# Altium PCB RockRTK.PcbDoc (part 4 of 8)
Units mm, origin at the board's own origin, x right, y up, seen from the top; angles counter-clockwise.
Board outline 128 x 72 mm, 6 copper layers (Top Layer, MidLayer1GND, MidLayer2SIG, MidLayer3PWR, MidLayer4GND, Bottom Layer), stack 1.538 mm thick; 400 components, 307 nets, 1795 pads, 1243 vias.
Unrouted connection lines stored in the file: 522.
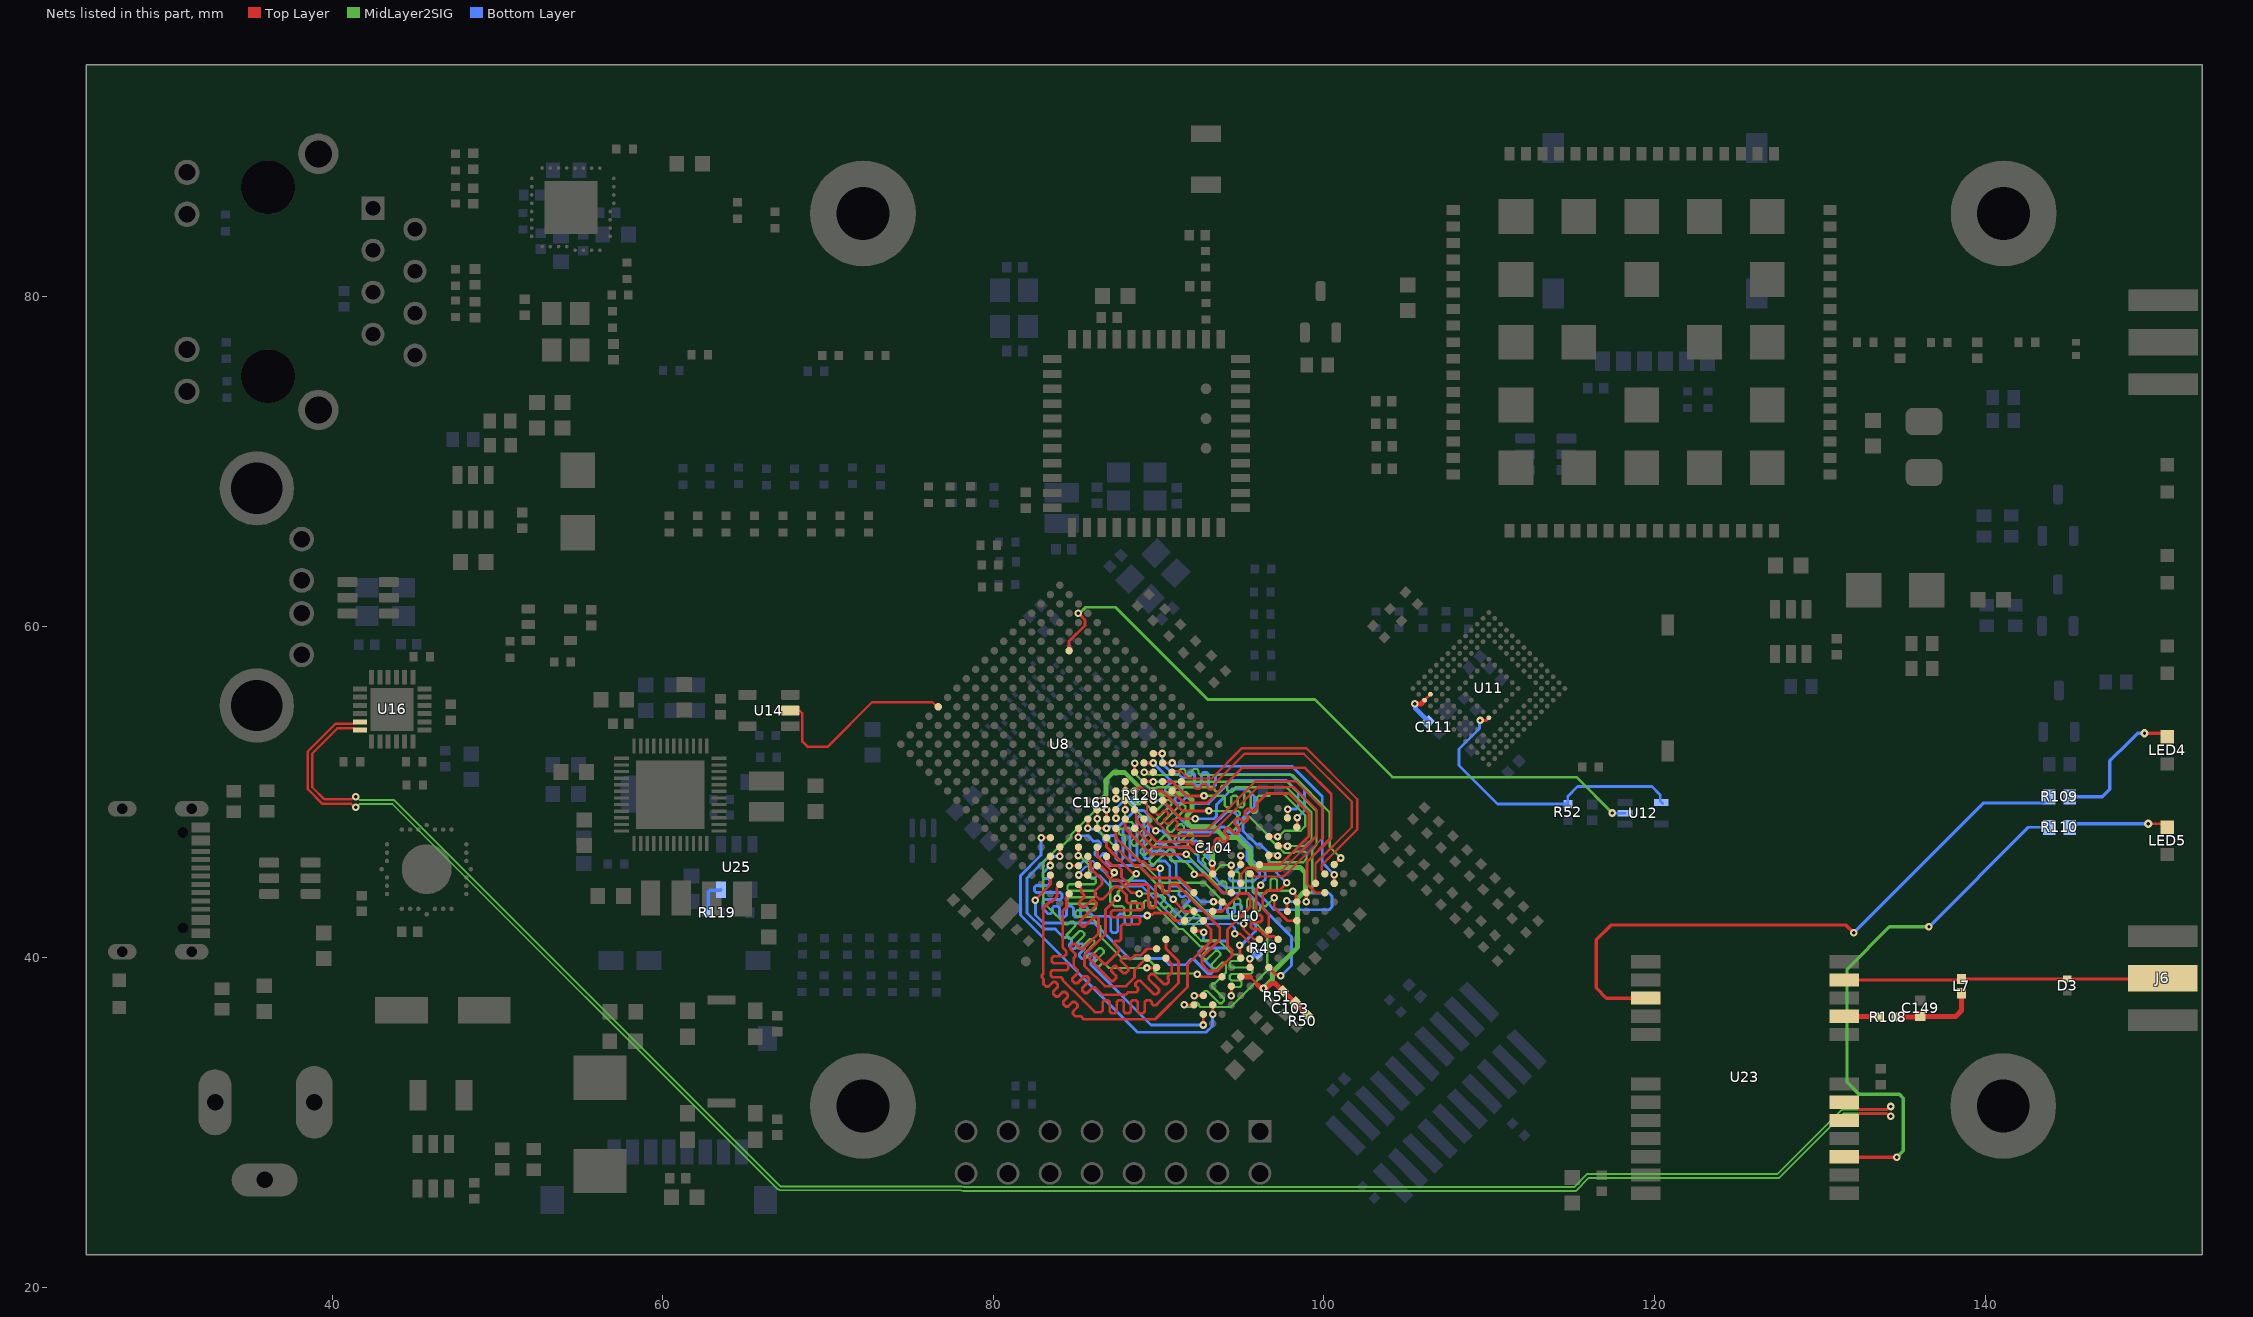
[diagram p7: the nets of this part, all layers, seen from the top]

## Via types
v1: diameter 0.5, hole 0.2, Top Layer to Bottom Layer, tented both sides, 532 vias
v2: diameter 0.457, hole 0.203, Top Layer to Bottom Layer, tented both sides, 414 vias
v3: diameter 0.5, hole 0.2, Top Layer to Bottom Layer, 233 vias
v4: diameter 0.7, hole 0.3, Top Layer to Bottom Layer, 32 vias
v5: diameter 0.457, hole 0.2, Top Layer to Bottom Layer, tented both sides, 30 vias
v6: diameter 0.7, hole 0.3, Top Layer to Bottom Layer, tented both sides, 2 vias

## Nets (pads, with @x,y where several pads share a name; then routed paths per layer and width w, separated by ;. In a path a pad name is that pad's centre, name@x,y a point inside that pad or via, vN(x,y) a via of type N, cw(c..) or ccw(c..) an arc to the next point about the centre after c; other vN are vias at no path point) (continued)
DDR3L_A5: U8.B1 U10.P2 | length 24.8
  Top Layer w0.169: U8.B1@84.592,43.836 84.592,43.784 84.404,43.597 84.404,43.456 84.425,43.435 84.425,43.025 84.2,42.8 84.2,40.838 84.2,40.589 84.306,40.483 84.412,40.377 84.412,40.166 84.306,40.06 83.651,40.06 83.546,39.954 83.546,39.742 83.651,39.636 84.436,39.636 84.542,39.531 84.542,39.319 84.436,39.213 83.584,39.213 83.478,39.107 83.478,38.896 83.584,38.79 84.094,38.79 84.2,38.684 84.2,38.625 84.226,38.599 85.45,37.375 86.15,36.675 86.518,36.675 86.624,36.781 86.624,37.29 86.729,37.396 86.941,37.396 87.047,37.29 87.047,36.72 87.153,36.614 87.364,36.614 87.47,36.72 87.47,37.29 87.576,37.396 87.788,37.396 87.893,37.29 87.893,36.72 87.999,36.614 88.211,36.614 88.317,36.72 88.317,37.29 88.422,37.396 88.634,37.396 88.74,37.29 88.74,36.72 88.846,36.614 89.057,36.614 89.163,36.72 89.163,37.29 89.269,37.396 89.481,37.396 89.587,37.29 89.587,37.198 89.692,37.092 89.842,37.092 90.094,37.344 91.2,38.45 91.2,39.757 90.447,40.51 90.447,41.053 U10.P2@90.425,41.075 ; U10.P2@90.376,41.099 U10.P2@90.475,41
DDR3L_A6: U8.D5 U10.R8 | length 21.7
  Top Layer w0.169: v2(82.9,47.225) 82.912,47.237 83.454,47.237 U8.D5@83.46,47.23 ; v2(93.275,36.55) U10.R8@93.275,37.118
  Bottom Layer w0.169: v2@82.895,47.22 82.895,46.175 81.648,44.928 81.648,42.548 88.736,35.46 92.882,35.46 93.27,35.848 v2@93.27,36.545
DDR3L_A7: U8.E2 U10.R2 | length 24.6
  Top Layer w0.169: U8.E2@85.723,46.099 85.723,46.026 85.89,45.859 85.89,45.368 86.23,45.029 86.582,44.676 86.582,44.437 86.154,44.009 86.154,43.77 86.394,43.53 86.633,43.53 87.343,44.24 87.582,44.24 87.642,44.18 88.067,43.755 88.067,43.451 88.067,43.366 88.173,43.26 88.909,43.26 89.014,43.154 89.014,42.943 88.909,42.837 87.233,42.837 87.127,42.731 87.127,42.519 87.233,42.414 88.779,42.414 88.885,42.308 88.885,42.096 88.779,41.99 87.831,41.99 87.725,41.885 87.725,41.575 87.725,41.406 87.725,41.067 87.64,40.982 87.386,40.982 87.302,40.898 87.302,40.798 87.616,40.483 87.616,40.363 86.838,39.585 86.719,39.585 86.142,40.161 86.023,40.161 85.843,39.982 85.843,39.862 87.137,38.568 87.257,38.568 87.436,38.748 87.436,38.867 87.138,39.166 87.138,39.286 87.317,39.465 87.437,39.465 87.875,39.028 87.994,39.028 88.174,39.207 88.174,39.327 87.736,39.765 87.736,39.884 87.916,40.064 88.036,40.064 88.215,39.884 88.335,39.884 88.564,40.114 88.9,40.114 88.919,40.114 89.317,40.512 U10.R2@89.881,40.512
DDR3L_A8: U8.D4 U10.T8 | length 21.5
  Top Layer w0.169: v2@84.03,46.105 U8.D4@84.03,46.671 ; v2@92.705,35.905 U10.T8@92.705,36.471
  Bottom Layer w0.169: v2(84.025,46.1) 83.35,46.1 82.05,44.8 82.05,42.685 83.035,41.7 83.75,41.7 83.916,41.534 83.92,41.534 84.099,41.355 84.159,41.295 84.178,41.276 84.178,41.272 84.257,41.193 84.407,41.193 84.432,41.218 84.581,41.218 84.731,41.068 84.731,40.918 84.621,40.809 84.621,40.659 84.771,40.509 84.921,40.509 85.226,40.815 85.375,40.815 85.525,40.665 85.525,40.515 85.22,40.21 85.22,40.06 85.369,39.911 85.519,39.911 85.824,40.216 85.974,40.216 86.124,40.066 86.124,39.917 85.903,39.696 85.903,39.547 86.263,39.187 89.55,35.9 v2(92.7,35.9)
DDR3L_A9: U8.C1 U10.R3 | length 24.5
  Top Layer w0.169: U8.C1@85.157,44.402 85.157,44.33 85.319,44.169 85.325,44.162 85.325,43.95 85.499,43.776 85.499,43.626 85.206,43.333 85.206,43.183 85.355,43.034 85.505,43.034 85.941,43.469 86.09,43.469 86.24,43.319 86.24,43.17 85.232,42.162 85.232,42.012 85.382,41.862 85.531,41.862 86.11,42.441 86.259,42.441 86.365,42.335 86.365,42.215 86.365,41.443 85.586,40.664 85.42,40.498 85.27,40.498 84.976,40.792 84.827,40.792 84.677,40.642 84.677,40.492 84.971,40.198 84.971,40.049 84.911,39.989 84.875,39.952 84.875,39.45 85.013,39.312 85.118,39.207 85.118,39.058 84.786,38.726 84.786,38.576 84.935,38.427 85.085,38.427 85.509,38.851 85.659,38.851 85.809,38.701 85.809,38.552 85.384,38.127 85.384,37.978 85.534,37.828 85.684,37.828 86.015,38.16 86.165,38.16 86.225,38.1 86.6,37.725 88,37.725 88.15,37.875 88.65,37.875 88.756,37.981 88.756,38.13 88.614,38.273 88.614,38.422 88.763,38.572 88.913,38.572 89.722,37.763 89.871,37.763 90.021,37.913 90.021,38.062 89.403,38.681 89.403,38.83 89.552,38.98 89.702,38.98 90.32,38.362 90.47,38.362 90.62,38.511 90.62,38.661 90.578,38.703 90.578,38.853 90.637,38.913 90.8,39.075 90.8,39.593 90.525,39.868 U10.R3@90.525,39.95
DDR3L_A10: U8.F4 U10.L7 | length 21.5
  Top Layer w0.169: v2@85.155,47.255 U8.F4@85.155,47.821 ; v2(94.9,40.725) 94.936,40.689 94.936,39.983 U10.L7@94.972,39.947
  Bottom Layer w0.169: v2@85.25,47.35 85.723,47.35 85.994,47.079 86.054,47.019 86.203,47.019 86.21,47.025 86.36,47.025 86.509,46.876 86.509,46.726 86.151,46.368 86.151,46.218 86.301,46.068 86.45,46.068 86.654,46.272 86.804,46.272 86.953,46.122 86.953,45.973 86.84,45.86 86.84,45.71 86.994,45.556 87.12,45.556 87.134,45.556 87.143,45.565 87.507,45.565 87.516,45.556 89.659,45.556 89.918,45.815 90.385,45.815 90.675,45.525 90.675,44.45 90.763,44.363 90.822,44.303 90.972,44.303 90.982,44.313 91.132,44.313 91.281,44.163 91.281,44.013 91.22,43.952 91.22,43.802 91.37,43.653 91.519,43.653 91.581,43.714 91.73,43.714 91.88,43.564 91.88,43.415 91.432,42.967 91.432,42.817 91.582,42.668 91.732,42.668 92.02,42.956 92.169,42.956 92.288,42.838 92.3,42.825 93.55,42.825 93.635,42.825 93.74,42.931 93.74,43.094 93.846,43.2 94.058,43.2 94.164,43.094 94.164,42.699 94.27,42.593 94.481,42.593 94.587,42.699 94.587,43.094 94.693,43.2 94.905,43.2 95.01,43.094 95.01,42.787 95.274,42.524 95.875,41.923 95.875,41.59 95.127,40.842 95.095,40.842 94.978,40.725 v2(94.9,40.725)
  other v2: 85.15,47.25
DDR3L_A11: U8.F2 U10.R7 | length 23.2
  Top Layer w0.169: U8.F2@86.289,46.664 86.303,46.651 86.303,46.087 87.265,45.125 v2(87.325,45.125) ; v2(92.15,37.675) 92.154,37.671 92.696,37.671 U10.R7@92.709,37.684
  MidLayer2SIG w0.139: v2@87.323,45.123 87.264,45.064 87.264,44.943 87.073,44.752 87.073,43.341 87.334,43.081 87.675,43.081 87.823,43.081 87.921,42.983 87.921,42.594 88.019,42.496 88.215,42.496 88.313,42.594 88.313,43.302 88.411,43.4 88.608,43.4 88.706,43.302 88.706,42.997 88.804,42.899 89,42.899 89.098,42.997 89.098,43.332 89.196,43.431 89.393,43.431 89.491,43.332 89.491,43.179 89.589,43.081 89.844,43.081 90.19,42.735 91.22,41.705 91.471,41.705 92.448,40.728 92.497,40.679 92.526,40.65 92.827,40.65 92.925,40.552 92.925,40.413 92.662,40.15 92.662,40.011 92.801,39.872 92.939,39.872 93.459,40.392 93.598,40.392 93.737,40.253 93.737,40.114 93.217,39.595 93.217,39.456 93.356,39.317 93.495,39.317 93.838,39.661 93.977,39.661 94.075,39.562 94.075,39.126 94.075,39.076 93.421,38.422 93.278,38.422 93.229,38.373 93.229,38.235 93.964,37.499 93.964,37.361 93.825,37.222 93.686,37.222 92.951,37.957 92.812,37.957 92.53,37.675 92.325,37.675 v2(92.15,37.675)
DDR3L_A12: U8.E3 U10.N7 | length 23.2
  Top Layer w0.169: v2(85.15,46.15) 85.154,46.154 85.154,46.628 U8.E3@85.175,46.649 ; v2(92.35,38.975) 92.428,38.975 92.588,38.815 U10.N7@93.841,38.815
  MidLayer2SIG w0.139: v2(85.15,46.15) 85.225,46.15 85.8,45.575 85.8,44.967 85.8,44.897 85.898,44.799 86.102,44.799 86.2,44.701 86.2,44.505 86.102,44.407 84.59,44.407 84.492,44.309 84.492,44.112 84.59,44.014 86.102,44.014 86.2,43.916 86.2,43.72 86.102,43.622 84.59,43.622 84.492,43.523 84.492,43.327 84.59,43.229 86.102,43.229 86.2,43.131 86.2,42.935 86.102,42.836 85.076,42.836 84.978,42.738 84.978,42.542 85.076,42.444 85.906,42.444 86.252,42.098 86.475,41.875 86.475,41.25 87.8,39.925 89.326,39.925 89.725,39.526 89.725,39.2 89.911,39.014 92.311,39.014 v2(92.35,38.975)
DDR3L_A13: U8.H3 U10.T3 | length 23.2
  Top Layer w0.169: U8.H3@86.845,48.354 v2@86.845,48.92 ; v2@89.305,39.345 U10.T3@89.871,39.345
  MidLayer2SIG w0.139: v2(86.85,48.925) 86.224,48.925 85.874,48.575 84.725,47.426 84.725,47.274 84.251,46.8 84.1,46.8 83.023,45.724 83.023,43.327 83.768,42.582 83.817,42.533 84.367,41.983 84.505,41.983 84.688,42.166 84.827,42.166 84.965,42.027 84.965,41.888 84.454,41.377 84.454,41.238 84.593,41.099 84.732,41.099 85.221,41.589 85.36,41.589 85.499,41.45 85.499,41.311 85.009,40.822 85.009,40.683 85.148,40.544 85.287,40.544 85.848,41.105 85.986,41.105 86.125,40.966 86.125,40.827 85.564,40.267 85.564,40.128 85.703,39.989 85.842,39.989 86.403,40.55 86.542,40.55 86.68,40.411 86.68,40.272 86.12,39.711 86.12,39.573 86.258,39.434 86.397,39.434 86.587,39.624 86.726,39.624 86.775,39.575 87,39.35 v2(89.3,39.35)
DDR3L_A14: U8.H4 U10.T7 | length 23.2
  Top Layer w0.169: U8.H4@86.289,48.924 86.289,48.393 v2@86.3,48.382 ; v2@91.55,37.123 91.569,37.104 92.13,37.104 U10.T7@92.144,37.118
  MidLayer2SIG w0.139: v2(86.3,48.375) 86.289,48.364 86.289,47.76 88.574,45.475 88.826,45.475 90.293,44.008 91.614,44.008 93.139,42.483 95.464,42.483 96.581,41.366 96.581,39.2 95.553,38.172 94.716,37.334 94.364,36.983 92.85,36.983 92.533,36.983 92.435,37.081 92.435,37.152 92.337,37.25 92.141,37.25 92.042,37.152 92.042,37.081 91.944,36.983 91.875,36.983 91.778,36.983 91.628,37.133 v2@91.558,37.133
  other v2: 91.55,37.125
DDR3L_B0: U8.C4 U10.M2 | length 21.5
  Top Layer w0.169: v2@83.455,45.626 U8.C4@83.455,46.096 ; v2(89.325,42.525) 89.38,42.58 89.632,42.58 89.727,42.675 90.549,42.675 91.014,42.209 91.582,42.209 U10.M2@91.596,42.195
  Bottom Layer w0.169: v2(83.448,45.548) 83,45.099 83,44.975 83,44.864 83.106,44.759 83.311,44.759 83.417,44.653 83.417,44.441 83.311,44.335 82.593,44.335 82.487,44.23 82.487,44.018 82.593,43.912 84.054,43.912 84.16,43.806 84.16,43.595 84.054,43.489 83.106,43.489 83,43.383 83,42.95 83.075,42.875 83.175,42.775 83.323,42.627 83.472,42.627 83.578,42.733 83.578,42.977 83.684,43.082 83.896,43.082 84.002,42.977 84.002,42.542 84.107,42.436 84.319,42.436 84.425,42.542 84.425,42.977 84.531,43.082 84.742,43.082 84.848,42.977 84.848,42.542 84.954,42.436 85.166,42.436 85.271,42.542 85.271,42.977 85.377,43.082 85.589,43.082 85.695,42.977 85.695,42.731 85.801,42.625 85.915,42.625 86.065,42.475 86.308,42.475 86.5,42.475 87.008,42.475 87.114,42.369 87.114,41.587 87.22,41.482 87.431,41.482 87.537,41.587 87.537,42.501 87.643,42.606 87.855,42.606 87.96,42.501 87.96,42.096 88.066,41.99 88.278,41.99 88.384,42.096 88.384,42.369 88.489,42.475 88.875,42.475 89.275,42.475 v2(89.325,42.525)
DDR3L_B1: U8.E1 U10.N8 | length 23.2
  Top Layer w0.169: U8.E1@86.289,45.533 86.343,45.479 86.545,45.479 86.885,45.14 86.885,44.943 87.143,44.685 87.34,44.685 87.35,44.675 87.575,44.675 88.345,43.905 88.77,43.905 v2(88.825,43.85) ; v2(94.4,37.675) 94.403,37.678 94.403,38.228 U10.N8@94.421,38.245
  MidLayer2SIG w0.139: v2(88.825,43.85) 89.731,43.85 89.841,43.741 89.89,43.692 90.028,43.692 90.09,43.753 90.228,43.753 90.367,43.614 90.367,43.475 90.17,43.278 90.17,43.139 90.309,43 90.448,43 90.554,43.107 90.692,43.107 90.831,42.968 90.831,42.829 90.725,42.723 90.725,42.584 90.864,42.445 91.003,42.445 91.686,43.129 91.825,43.129 91.964,42.99 91.964,42.851 91.367,42.254 91.367,42.115 91.505,41.977 91.644,41.977 92.242,42.574 92.38,42.574 92.519,42.435 92.519,42.296 91.971,41.749 91.971,41.61 92.581,41 92.852,41 93.65,41 94.32,40.33 94.487,40.163 95.002,40.163 95.1,40.065 95.1,39.869 95.002,39.77 94.411,39.77 94.313,39.672 94.313,39.476 94.411,39.378 95.577,39.378 95.675,39.28 95.675,39.083 95.577,38.985 94.411,38.985 94.313,38.887 94.313,38.691 94.411,38.593 94.925,38.593 95.024,38.495 95.024,38.298 94.925,38.2 94.498,38.2 94.4,38.102 94.4,37.74 v2(94.4,37.675)
DDR3L_B2: U8.B3 U10.M3 | length 21.5
  Top Layer w0.169: v2(82.55,43.45) 82.55,43.489 83.46,44.4 U8.B3@83.46,44.967 ; U10.M3@92.18,41.621 92.211,41.59 92.557,41.59 92.647,41.5 v2(92.725,41.5)
  Bottom Layer w0.169: v2@82.55,43.475 82.55,42.55 83.035,42.065 86.107,42.065 86.148,42.025 86.15,42.025 88.25,39.925 90.25,39.925 90.625,39.55 90.65,39.55 91.65,39.55 91.979,39.879 92.128,39.879 93.005,39.002 93.155,39.002 93.305,39.151 93.305,39.301 92.428,40.178 92.428,40.328 92.487,40.387 92.514,40.414 92.661,40.561 94.055,40.561 94.16,40.667 94.16,40.879 94.055,40.985 92.831,40.985 92.725,41.09 92.725,41.175 v2(92.725,41.5)
DDR3L_CASN: U8.F1 U10.K3 | length 24.6
  Top Layer w0.169: U8.F1@86.854,46.099 86.908,46.045 86.908,45.847 87.19,45.565 87.507,45.565 87.765,45.307 87.765,44.85 88.215,44.4 88.771,44.4 89.279,44.4 89.384,44.294 89.384,43.071 89.49,42.965 89.702,42.965 89.808,43.071 89.808,44.335 89.914,44.441 90.125,44.441 90.231,44.335 90.231,43.983 90.337,43.877 90.549,43.877 90.654,43.983 90.654,44.294 90.76,44.4 90.931,44.4 91.1,44.4 91.745,43.755 91.745,43.741 92.544,42.942 92.558,42.942 93.7,41.8 93.7,41.075 92.625,40 92.625,39.575 93.025,39.175 93.55,39.175 94.45,40.075 94.45,40.425 94.175,40.7 94.175,41.675 95.55,43.05 95.55,43.677 95.377,43.85 94.904,43.85 94.805,43.751 94.805,43.741 94.006,42.942 93.992,42.942 93.825,42.775 U10.K3@93.275,42.775
DDR3L_CLK_N: U8.D1 U10.K7 | length 14.3
  Top Layer w0.138: v2(85.175,44.975) 85.179,44.971 85.719,44.971 U8.D1@85.723,44.967 ; v2(94.618,41.43) 94.626,41.421 94.949,41.421 95.209,41.161 95.213,41.161 95.532,40.842 95.532,40.518 U10.K7@95.538,40.512
  Bottom Layer w0.138: v2(85.175,44.975) 85.175,45.061 85.597,45.484 85.628,45.484 85.883,45.484 86.012,45.355 86.012,45.216 85.817,45.021 85.817,44.883 85.956,44.744 86.094,44.744 86.289,44.939 86.428,44.939 86.763,44.604 87.083,44.284 89.008,44.284 91.283,42.009 94.361,42.009 94.609,41.761 94.609,41.438 v2(94.618,41.43)
DDR3L_CLK_P: U8.D2 U10.J7 | length 14.4
  Top Layer w0.138: v2(84.6,45.525) 84.604,45.529 85.153,45.529 U8.D2@85.157,45.533 ; v2(95.15,42.025) 95.159,42.016 95.159,41.694 95.35,41.502 95.355,41.502 95.774,41.083 96.098,41.083 U10.J7@96.103,41.078
  Bottom Layer w0.138: v2(84.6,45.525) 84.66,45.585 84.72,45.525 85.156,45.525 85.456,45.825 86.025,45.825 87.224,44.625 89.149,44.625 91.424,42.35 94.502,42.35 94.819,42.034 95.141,42.034 v2(95.15,42.025)
DDR3L_CSE: U8.G3 U10.K9 | length 19.6
  Top Layer w0.169: U8.G3@86.274,47.8 86.277,47.798 86.848,47.798 v2(86.85,47.8) ; U10.K9@96.73,39.341 96.73,39.32 97.12,38.93 97.345,38.93 v2(97.4,38.875)
  Bottom Layer w0.169: v2(86.85,47.8) 86.928,47.8 87.053,47.925 87.598,47.925 88.415,48.743 88.415,48.768 88.523,48.875 89.125,48.875 89.4,48.6 89.4,47.848 89.385,47.832 89.385,47.468 90.002,46.85 90.4,46.85 91.375,45.875 91.402,45.875 91.493,45.785 92.015,45.785 93.925,43.875 95.4,43.875 98.035,41.24 98.035,40.325 98.044,40.315 98.044,40.171 98.035,40.162 98.035,39.51 v2(97.4,38.875)
DDR3L_CSN: U8.H2 U10.L2 | length 8
  Top Layer w0.169: U8.H2@87.43,47.846 87.43,47.223 88.854,45.798 89.086,45.798 89.565,45.32 90.045,45.32 v2(90.1,45.375) ; v2(90.9,43.5) 90.9,43.455 91.58,42.775 92.166,42.775 U10.L2@92.171,42.77
  Bottom Layer w0.169: v2(90.1,45.375) 90.045,45.32 90.045,44.33 90.875,43.5 v2(90.9,43.5)
DDR3L_D0: U8.M3 U10.D7 | length 17.5
  Top Layer w0.169: U8.M3@89.117,50.624 v2(89.675,50.625) ; v2(98.925,43.35) 98.921,43.354 98.921,43.896 U10.D7@98.932,43.906
  MidLayer2SIG w0.139: v2@89.68,50.62 97.78,50.62 99.55,48.85 99.55,46.8 99.3,46.55 99.3,44.004 98.961,43.665 98.961,43.386 v2(98.925,43.35)
DDR3L_D1: U8.M4 U10.C3 | length 17.5
  Top Layer w0.169: U8.M4@88.545,51.154 v2@88.545,51.72 ; U10.C3@97.229,46.73 v2@97.795,46.73
  MidLayer2SIG w0.139: v2@88.55,51.675 88.55,51.65 88.55,51.125 89.4,50.275 89.424,50.275 89.499,50.2 89.851,50.2 89.926,50.275 92.675,50.275 93.282,50.275 93.38,50.177 93.38,50.117 93.478,50.019 93.674,50.019 93.772,50.117 93.772,50.295 93.871,50.393 94.067,50.393 94.165,50.295 94.165,50.101 94.263,50.002 94.459,50.002 94.558,50.101 94.558,50.177 94.656,50.275 94.725,50.275 97.75,50.275 99.25,48.775 99.25,47.1 98.875,46.725 v2(97.8,46.725)
  other v2: 88.55,51.725
DDR3L_D2: U8.N1 U10.C8 | length 18.8
  Top Layer w0.169: U8.N1@90.814,50.059 91.523,49.35 92.552,49.35 92.568,49.335 92.932,49.335 95.054,51.456 98.869,51.456 100.45,49.875 100.45,47.225 98.975,45.75 98.975,44.427 99.495,43.906 U10.C8@100.063,43.906
DDR3L_D3: U8.N2 U10.C2 | length 17.4
  Top Layer w0.169: U8.N2@90.254,50.63 90.82,50.63 90.981,50.469 90.981,50.459 91.691,49.75 v2@92.675,49.75 ; U10.C2@96.629,47.305 v2@97.195,47.305
  MidLayer2SIG w0.139: v2(92.75,49.775) 93.45,49.775 93.912,49.775 94.01,49.677 94.01,49.176 94.108,49.077 94.304,49.077 94.403,49.176 94.403,49.677 94.501,49.775 94.697,49.775 94.795,49.677 94.795,49.176 94.893,49.077 95.089,49.077 95.188,49.176 95.188,49.949 95.286,50.048 95.482,50.048 95.58,49.949 95.58,48.84 95.678,48.742 95.875,48.742 95.973,48.84 95.973,49.677 96.071,49.775 96.5,49.775 96.7,49.775 96.85,49.925 97.526,49.925 98.868,48.583 98.868,47.918 98.6,47.65 97.617,47.65 97.267,47.3 v2(97.2,47.3)
DDR3L_D4: U8.N3 U10.A7 | length 17.5
  Top Layer w0.169: v2@89.13,51.195 U8.N3@89.696,51.195 ; U10.A7@100.622,45.601 v2@101.023,46.001
  MidLayer2SIG w0.139: v2@89.175,51.275 89.175,51.236 89.319,51.092 89.358,51.092 89.4,51.05 89.851,51.05 89.876,51.025 91.075,51.025 91.144,51.025 91.242,51.123 91.242,51.286 91.341,51.384 91.537,51.384 91.635,51.286 91.635,51.052 91.733,50.953 91.929,50.953 92.028,51.052 92.028,51.286 92.126,51.384 92.322,51.384 92.42,51.286 92.42,51.123 92.518,51.025 92.707,51.025 98.1,51.025 100.35,48.775 100.35,46.681 v2(101.029,46.001)
  other v2: 89.125,51.2
DDR3L_D5: U8.N4 U10.A2 | length 15.9
  Top Layer w0.169: U8.N4@89.104,51.755 v2@89.67,51.755 ; U10.A2@97.82,48.379 v2@97.82,48.945
  Bottom Layer w0.169: v2@89.6,51.65 89.606,51.656 89.769,51.656 90.375,51.05 90.734,50.691 90.734,50.541 90.402,50.209 90.402,50.059 90.551,49.91 90.701,49.91 91.136,50.344 91.286,50.344 91.435,50.195 91.435,50.045 91,49.61 91,49.461 91.15,49.311 91.3,49.311 91.632,49.643 91.782,49.643 92.117,49.308 93.033,49.308 94.425,50.7 97.725,50.7 98.45,49.975 98.45,49.057 98.351,48.958 97.833,48.958 v2(97.825,48.95)
  other v2: 89.675,51.75
DDR3L_D6: U8.P3 U10.B8 | length 16
  Top Layer w0.169: U8.P3@90.254,51.755 v2@90.82,51.755 ; U10.B8@100.62,44.429 v2@100.62,44.995
  Bottom Layer w0.169: v2(90.825,51.75) 90.868,51.75 91.068,51.55 98.075,51.55 99.9,49.725 99.9,45.725 100.531,45.094 100.531,45.056 v2@100.525,45.05
  other v2: 100.625,45
DDR3L_D7: U8.P4 U10.A3 | length 15.9
  Top Layer w0.169: U8.P4@89.654,52.33 v2@90.22,52.33 ; U10.A3@98.395,47.879 v2@98.395,48.445
  Bottom Layer w0.169: v2@90.275,52.25 90.225,52.2 90.225,51.727 90.877,51.075 90.932,51.075 91.226,51.075 91.332,50.969 91.438,50.863 91.65,50.863 91.756,50.969 91.756,51.075 91.861,51.181 92.073,51.181 92.179,51.075 92.179,50.504 92.285,50.398 92.496,50.398 92.602,50.504 92.602,51.077 92.708,51.183 92.92,51.183 93.025,51.077 93.025,50.395 93.131,50.289 93.343,50.289 93.449,50.395 93.449,50.969 93.555,51.075 93.639,51.075 97.95,51.075 98.825,50.2 98.825,48.875 v2(98.4,48.45)
  other v2: 90.225,52.325
DDR3L_D8: U8.J1 U10.E3 | length 21.2
  Top Layer w0.169: U8.J1@88.552,47.796 89.697,46.65 91.477,46.65 91.493,46.665 91.857,46.665 92.123,46.4 93.05,46.4 93.338,46.688 93.398,46.748 93.398,46.898 93.394,46.901 93.394,47.051 93.544,47.2 93.694,47.2 93.898,46.996 94.048,46.996 94.198,47.145 94.198,47.295 93.993,47.5 93.993,47.649 94.143,47.799 94.292,47.799 94.598,47.493 94.747,47.493 94.897,47.643 94.897,47.793 94.592,48.098 94.592,48.248 94.741,48.398 94.891,48.398 95.108,48.18 95.258,48.18 95.407,48.33 95.407,48.48 95.213,48.674 95.213,48.824 95.362,48.974 95.512,48.974 95.643,48.843 95.792,48.843 95.942,48.993 95.942,49.142 95.942,49.292 96.184,49.534 96.55,49.9 97.027,49.9 97.043,49.915 97.407,49.915 97.423,49.9 97.9,49.9 99.1,48.7 99.1,47.327 97.376,45.603 U10.E3@96.078,45.603
DDR3L_D9: U8.K1 U10.F7 | length 18.2
  Top Layer w0.169: U8.K1@89.12,48.381 89.12,48.356 89.825,47.652 v2(89.825,47.65) ; v2(97.75,43.425) 97.775,43.4 97.775,42.8 U10.F7@97.8,42.775
  Bottom Layer w0.169: v2(89.825,47.65) 90.2,47.65 91.185,46.665 91.857,46.665 92.4,46.123 92.4,45.85 93.41,44.84 93.41,44.818 93.668,44.56 93.69,44.56 94.05,44.2 95.702,44.2 96.743,43.16 96.743,43.132 97,42.875 100.325,42.875 100.49,43.04 100.49,43.686 100.301,43.875 98.725,43.875 98.2,43.35 v2@97.875,43.35
DDR3L_D10: U8.K2 U10.F2 | length 18.1
  Top Layer w0.169: U8.K2@88.552,48.927 88.552,48.851 88.654,48.749 88.654,48.257 88.95,47.961 88.95,47.902 89.861,46.991 91.896,46.991 92.038,46.85 v2(92.525,46.85) ; U10.F2@94.972,45.603 94.972,46.122 v2@94.975,46.125
  Bottom Layer w0.169: v2(92.525,46.85) 92.457,46.85 92.282,47.025 91.325,47.025 91.225,47.125 91.225,47.476 91.324,47.575 93.475,47.575 93.56,47.575 93.665,47.681 93.665,47.776 93.771,47.882 93.983,47.882 94.089,47.776 94.089,47.681 94.195,47.575 94.325,47.575 94.335,47.575 95.35,46.56 95.35,45.86 96.122,45.088 96.122,44.947 95.778,44.603 94.389,44.603 94.29,44.702 94.29,44.843 94.975,45.527 v2(94.975,46.15)
DDR3L_D11: U8.K3 U10.F8 | length 19.8
  Top Layer w0.169: v2(87.975,48.925) 87.98,48.93 U8.K3@87.98,49.495 ; v2@97,43.55 97,43.012 97.803,42.209 U10.F8@98.366,42.209
  MidLayer2SIG w0.139: v2(87.975,48.925) 87.975,48.375 87.975,48.276 88.073,48.178 88.363,48.178 88.461,48.079 88.461,47.883 88.363,47.785 87.709,47.785 87.611,47.687 87.611,47.491 87.709,47.392 87.877,47.392 87.975,47.294 87.975,47.225 87.975,46.75 90.223,44.502 92.774,44.502 93.5,43.776 94.17,43.106 94.17,43.075 94.268,42.977 94.464,42.977 94.562,43.075 94.562,43.448 94.661,43.546 94.857,43.546 94.955,43.448 94.955,42.86 95.053,42.762 95.249,42.762 95.347,42.86 95.347,43.449 95.446,43.548 95.642,43.548 95.74,43.449 95.74,42.86 95.838,42.762 96.034,42.762 96.133,42.86 96.133,42.977 96.231,43.075 96.3,43.075 96.475,43.075 v2(97,43.6)
DDR3L_D12: U8.K4 U10.H3 | length 19.8
  Top Layer w0.169: U8.K4@87.423,50.064 87.423,49.602 v2(87.425,49.6) ; v2(92.15,45.025) 92.205,44.97 92.775,44.97 93.839,43.906 U10.H3@94.406,43.906
  MidLayer2SIG w0.139: v2(87.425,49.6) 87.92,49.6 88.932,48.588 88.932,48.49 89.031,48.392 89.169,48.392 89.277,48.5 89.416,48.5 89.555,48.361 89.555,48.222 88.352,47.02 88.352,46.881 88.491,46.742 88.63,46.742 89.312,47.424 89.45,47.424 89.589,47.285 89.589,47.146 88.907,46.465 88.907,46.326 89.046,46.187 89.185,46.187 90.388,47.39 90.526,47.39 90.665,47.251 90.665,47.112 89.463,45.909 89.463,45.771 89.601,45.632 89.74,45.632 90.691,46.583 90.83,46.583 90.969,46.444 90.969,46.305 90.7,46.037 90.7,45.898 90.799,45.8 91.105,45.8 91.6,45.8 92.092,45.308 92.092,45.083 v2(92.15,45.025)
DDR3L_D13: U8.L3 U10.H8 | length 18.2
  Top Layer w0.169: U8.L3@88.552,50.059 88.603,50.059 88.791,50.247 88.931,50.247 89.675,49.503 v2(89.675,49.5) ; v2(96.175,44.35) 96.153,44.35 95.909,44.107 95.909,42.866 95.925,42.85 95.925,42.662 96.031,42.556 96.154,42.556 96.26,42.45 96.26,42.239 96.154,42.133 95.696,42.133 95.59,42.027 95.59,41.815 95.696,41.71 96.039,41.71 96.124,41.625 96.171,41.625 96.271,41.526 96.271,41.479 96.504,41.245 96.834,41.245 96.855,41.266 96.995,41.266 97.183,41.078 U10.H8@97.235,41.078
  Bottom Layer w0.169: v2(89.675,49.5) 90.182,49.5 91.747,47.935 93.273,47.935 94.139,48.8 94.55,48.8 94.775,48.575 94.775,47.55 95.66,46.665 95.66,45.915 96.45,45.125 96.45,44.693 96.175,44.418 v2(96.175,44.35)
DDR3L_D14: U8.L4 U10.G2 | length 19.8
  Top Layer w0.169: v2(87.975,50.075) 87.98,50.08 87.98,50.621 U8.L4@88.005,50.646 ; v2@94.375,45.575 94.406,45.544 U10.G2@94.406,45.038
  MidLayer2SIG w0.139: v2(87.975,50.075) 88.325,50.075 88.426,50.075 88.702,49.799 88.702,49.66 88.579,49.537 88.579,49.398 88.718,49.26 88.857,49.26 88.98,49.383 89.118,49.383 89.351,49.149 89.4,49.1 89.63,48.871 89.679,48.822 89.818,48.822 90.506,49.509 90.644,49.509 90.783,49.371 90.783,49.232 89.883,48.332 89.883,48.193 90.022,48.054 90.161,48.054 91.357,49.251 91.496,49.251 91.635,49.112 91.635,48.973 90.519,47.857 90.519,47.719 90.658,47.58 90.797,47.58 91.26,48.043 91.399,48.043 91.538,47.905 91.538,47.766 90.962,47.19 90.962,47.051 91.101,46.912 91.24,46.912 91.835,47.507 91.973,47.507 92.112,47.369 92.112,47.23 91.761,46.879 91.761,46.74 91.939,46.562 91.988,46.513 92.213,46.288 92.262,46.239 92.401,46.239 92.518,46.356 92.656,46.356 92.795,46.217 92.795,46.078 92.678,45.961 92.678,45.823 92.689,45.812 92.738,45.763 92.825,45.676 92.825,45.499 93.124,45.2 93.425,45.2 93.8,45.575 v2(94.4,45.575)
DDR3L_D15: U8.M1 U10.H7 | length 18.2
  Top Layer w0.169: U8.M1@90.249,49.493 91.362,48.38 92.22,48.38 v2(92.225,48.375) ; U10.H7@96.638,41.675 U10.H7@96.65,41.675 ; U10.H7@96.669,41.644 96.669,42.581 96.3,42.95 96.3,43.775 96.565,44.04 97.315,44.04 97.75,44.475 v2(97.75,44.5)
  Bottom Layer w0.169: v2(92.225,48.375) 93.348,48.375 93.5,48.527 93.5,49.225 94.45,50.175 95.35,50.175 95.8,49.725 95.8,49.125 95.11,48.435 95.11,47.643 95.918,46.835 96.14,46.835 96.675,46.3 96.675,45.575 v2(97.75,44.5)
DDR3L_DQM0: U8.M2 U10.D3 | length 17.6
  Top Layer w0.169: U8.M2@89.654,50.055 90.22,50.055 90.384,49.891 90.418,49.891 91.459,48.85 v2@93.033,48.85 ; U10.D3@96.629,46.155 v2@97.195,46.155
  MidLayer2SIG w0.139: v2(93.05,48.85) 94.5,48.85 94.818,48.85 94.916,48.752 94.916,48.613 94.194,47.891 94.194,47.752 94.332,47.613 94.471,47.613 95.36,48.502 95.499,48.502 95.701,48.299 95.75,48.25 96.775,47.226 96.775,47.124 97.044,46.855 97.106,46.855 97.365,46.596 97.365,46.559 97.624,46.3 98.162,46.3 98.262,46.4 98.85,46.4 98.95,46.3 98.95,45.95 98.75,45.75 96.775,45.75 96.607,45.918 96.607,46.032 96.845,46.27 96.994,46.27 97.114,46.15 v2(97.2,46.15)
DDR3L_DQM1: U8.J2 U10.E7 | length 19.9
  Top Layer w0.169: U8.J2@87.98,48.421 87.98,47.804 89.559,46.225 v2(91.675,46.225) ; v2(98.125,44) 98.125,43.922 98.312,43.735 98.312,43.394 U10.E7@98.366,43.341
  MidLayer2SIG w0.139: v2(91.675,46.225) 93.415,44.485 93.502,44.398 93.641,44.398 93.819,44.575 94.015,44.575 94.113,44.477 94.113,43.925 94.211,43.826 94.408,43.826 94.506,43.925 94.506,45.052 94.604,45.15 94.8,45.15 94.898,45.052 94.898,43.925 94.997,43.826 95.193,43.826 95.291,43.925 95.291,45.117 95.389,45.216 95.585,45.216 95.684,45.117 95.684,43.973 95.782,43.875 96.2,43.875 96.475,43.875 96.6,44 96.625,44.025 96.669,44.025 96.767,44.123 96.767,44.668 96.866,44.766 97.062,44.766 97.16,44.668 97.16,44.123 97.258,44.025 97.45,44.025 98.1,44.025 v2(98.125,44)
DDR3L_DQS0_N: U8.P2 U10.B7 | length 19
  Top Layer w0.138: U8.P2@90.814,51.19 90.874,51.25 91.344,51.25 91.787,50.807 93.212,50.807 95.055,52.65 98.933,52.65 102.025,49.558 102.025,47.725 99.875,45.575 99.875,45.275 100.063,45.086 U10.B7@100.063,45.038
DDR3L_DQS0_P: U8.P1 U10.C7 | length 19
  Top Layer w0.138: U8.P1@91.38,50.54 U8.P1@91.38,50.624 91.464,50.624 91.475,50.614 91.578,50.51 91.601,50.51 91.646,50.466 92.075,50.466 92.173,50.368 92.173,50.288 92.271,50.19 92.467,50.19 92.565,50.288 92.565,50.368 92.662,50.466 92.858,50.466 92.956,50.368 92.956,50.267 93.054,50.169 93.25,50.169 93.348,50.267 93.348,50.461 93.564,50.676 95.197,52.309 98.791,52.309 101.684,49.416 101.684,47.866 99.492,45.675 99.492,44.477 U10.C7@99.498,44.472
DDR3L_DQS1_N: U8.L2 U10.G3 | length 21.3
  Top Layer w0.138: U8.L2@89.117,49.493 89.117,49.439 89.3,49.256 89.3,48.769 89.994,48.075 90.001,48.075 90.25,47.826 90.25,47.819 90.572,47.497 90.719,47.35 93.05,47.35 96,50.3 98.175,50.3 99.559,48.916 99.559,47.341 97.483,45.266 97.433,45.266 97.388,45.221 97.175,45.221 96.275,45.221 95.945,45.221 95.745,45.421 95.379,45.421 95.011,45.053 95.011,44.511 U10.G3@94.972,44.472
DDR3L_DQS1_P: U8.L1 U10.F3 | length 21.4
  Top Layer w0.138: U8.L1@89.683,48.927 89.683,48.868 89.744,48.807 89.929,48.622 90.068,48.622 90.314,48.869 90.453,48.869 90.592,48.73 90.592,48.592 90.348,48.348 90.348,48.21 90.487,48.071 90.625,48.071 90.871,48.317 91.01,48.317 91.148,48.179 91.148,48.04 91.061,47.953 91.061,47.814 91.159,47.716 91.425,47.716 91.445,47.697 91.457,47.697 92.914,47.697 95.859,50.641 98.316,50.641 99.9,49.057 99.9,47.2 97.625,44.925 97.574,44.925 97.529,44.879 97.175,44.879 96.275,44.879 95.804,44.879 95.759,44.924 95.736,44.924 95.622,45.038 U10.F3@95.538,45.038 ; U10.F3@95.5,45 U10.F3@95.575,45
DDR3L_ODT: U8.G1 U10.K1 | length 5.9
  Top Layer w0.169: U8.G1@87.42,46.664 88.544,45.54 88.835,45.54 89.575,44.8 91.25,44.8 92.1,43.95 U10.K1@92.1,43.9
DDR3L_RASN: U8.G4 U10.J3 | length 21.6
  Top Layer w0.169: v2@85.73,47.805 U8.G4@85.73,48.371 ; v2@93.305,43.32 U10.J3@93.871,43.32
  Bottom Layer w0.169: v2(85.725,47.8) 85.78,47.745 86.255,47.745 86.663,47.337 86.663,47.087 86.747,47.003 86.897,47.003 87.003,47.109 87.003,47.254 87.109,47.36 87.32,47.36 87.426,47.254 87.426,45.976 87.532,45.871 87.744,45.871 87.849,45.976 87.849,47.731 87.955,47.837 88.167,47.837 88.273,47.731 88.273,45.976 88.378,45.871 88.59,45.871 88.696,45.976 88.696,48.41 88.802,48.516 89.013,48.516 89.119,48.41 89.119,46.066 89.225,45.96 89.437,45.96 89.543,46.066 89.543,46.319 89.648,46.425 89.983,46.425 90.3,46.425 91.075,45.65 91.075,44.852 92.577,43.35 93.375,43.35 v2@93.4,43.325
  other v2: 93.325,43.35
DDR3L_RESETN: U8.G2 U10.T2 | length 15.1
  Top Layer w0.169: U8.G2@86.855,47.246 86.855,46.68 87.022,46.513 87.022,46.499 88.416,45.105 88.595,45.105 v2(88.65,45.05) ; v2(87.5,43.575) 86.8,42.875 86.8,41.4 85.525,40.125 85.525,39.475 86.75,38.25 88.025,38.25 88.55,38.775 88.55,39.223 89.274,39.947 U10.T2@89.315,39.947
  MidLayer2SIG w0.169: v2@87.55,43.6 87.555,43.605 87.555,43.955 v2(88.65,45.05)
DDR3L_VTP: R120.2 U8.J3 | length 2.6
  Top Layer w0.169: v2@87.43,48.405 U8.J3@87.43,48.971
  Bottom Layer w0.152: 87.425,48.925 87.425,48.986 87.796,49.357
  Bottom Layer w0.169: v2(87.425,48.4) 87.425,48.925 ; 87.813,49.365 88.082,49.635 88.29,49.635 88.479,49.446 R120.2@88.546,49.446
DDR3L_WEN: U8.B2 U10.L3 | length 24.6
  Top Layer w0.169: U8.B2@84.026,44.402 84.026,44.35 83.838,44.162 83.838,44.022 83.859,44.001 83.859,43.671 83.544,43.356 83.42,43.356 83.025,42.961 83.025,39 82.95,38.925 82.95,38.775 83.01,38.715 83.045,38.68 83.045,38.53 83.035,38.52 83.035,38.37 83.185,38.221 83.334,38.221 83.606,38.493 83.756,38.493 83.906,38.343 83.906,38.193 83.634,37.921 83.634,37.772 83.783,37.622 83.933,37.622 84.205,37.894 84.355,37.894 84.504,37.744 84.504,37.595 84.232,37.323 84.232,37.173 84.382,37.023 84.532,37.023 84.804,37.295 84.953,37.295 85.103,37.146 85.103,36.996 84.831,36.724 84.831,36.574 84.981,36.425 85.13,36.425 85.14,36.435 85.29,36.435 85.35,36.375 85.475,36.25 89.8,36.25 91.75,38.2 91.75,39.55 93.165,40.965 93.165,41.682 92.709,42.138 U10.L3@92.709,42.209
DDR3L_ZQ: R49.2 U10.L8 | length 1.1
  Top Layer w0.169: U10.L8@95.525,39.374 95.531,39.381 95.531,39.894 v2(95.525,39.9)
  Bottom Layer w0.254: v2(95.525,39.9) 95.58,39.9 95.876,40.196 R49.2@95.996,40.196
DDR_VREF: C103.1 C104.1 C161.1 R50.1 R51.1 U8.J4 U10.H1 U10.M8 | length 35.5
  Top Layer w0.152: 95.55,38.8 95.975,38.375
  Top Layer w0.305: v2(93.25,45.675) 93.263,45.662 93.263,45.087 U10.H1@93.305,45.045 ; U10.M8@94.972,38.815 95.535,38.815 95.55,38.8 ; 96,38.325 96.236,38.089 96.489,38.089 96.815,38.415 97.067,38.415 R51.1@97.529,37.954 ; R51.1@97.552,37.952 99.029,36.475 R50.1@99.05,36.475 ; R50.1@98.925,36.434 98.925,36.375 R50.1@98.933,36.375
  Top Layer w0.381: v2(86.45,49.475) 86.459,49.484 86.846,49.484 U8.J4@86.854,49.493
  MidLayer2SIG w0.152: 89.15,49.975 89.193,49.932 90.075,49.932
  MidLayer2SIG w0.203: 90.075,49.932 90.117,49.889
  MidLayer2SIG w0.279: v2(86.45,49.475) 86.82,49.845 86.82,50.728 87.267,51.175 87.95,51.175 89.15,49.975
  MidLayer2SIG w0.305: 90.117,49.889 91.661,49.889 92.015,49.535 92.015,48.883 91.717,48.585 91.717,48.165 92.015,47.867 93.374,47.867 94.008,47.233 ; v2(93.25,45.675) 93.25,46.475 94.008,47.233 ; v2(96.35,38.125) 96.892,38.667 96.892,39.085 98.417,40.61 98.417,43.574 98.883,44.04 98.883,45.11 98.568,45.425 95.815,45.425 95.575,45.665 95.575,46.45 94.792,47.233 94.008,47.233
  Bottom Layer w0.2: v2@86.45,49.525 86.573,49.525 86.524,49.574 86.524,49.524 v2@86.475,49.475
  Bottom Layer w0.279: C161.1@86.15,49.209 v2@86.424,49.482
  Bottom Layer w0.305: C104.1@93.011,46.261 93.011,46.066 93.221,45.856 93.221,45.704 v2(93.25,45.675)
EEPROM_WP: R119.1 U25.5 | length 1.8
  Bottom Layer w0.203: R119.1@62.75,42.95 62.75,43.931 62.869,44.05 63.5,44.05 U25.5@63.525,44.075
EMMC_RSTN: R52.1 U11.K5 U12.4 | length 18.5
  Top Layer w0.169: v2(109.45,54.325) 109.821,54.325 U11.K5@109.986,54.489
  Bottom Layer w0.169: v2(109.45,54.325) 109.42,54.295 109.42,53.842 108.176,52.598 108.176,51.599 110.5,49.275 R52.1@114.75,49.275 ; R52.1@114.786,49.26 R52.1@114.761,49.26 114.761,49.736 115.35,50.325 119.85,50.325 120.35,49.825 120.35,49.45 U12.4@120.5,49.3
EMMC_RSTN_BUF: U8.R14 U12.2 | length 41.1
  Top Layer w0.169: U8.R14@84.592,58.544 84.592,59.112 85.556,60.076 85.556,60.406 85.323,60.639 v2@85.218,60.743
  MidLayer2SIG w0.169: v2(85.15,60.8) 85.225,60.8 85.6,61.175 87.4,61.175 92.978,55.597 99.459,55.597 104.162,50.893 115.282,50.893 v2(117.45,48.725)
  Bottom Layer w0.169: v2@117.46,48.71 U12.2@118.211,48.71
EMMC_VDDI: C111.1 U11.C1 U11.C2 | length 2.6
  Top Layer w0.169: U11.C1@106.073,55.527 U11.C1@106.097,55.55 ; U11.C1@106.1,55.553 U11.C2@106.45,55.904
  Top Layer w0.305: v2(105.5,55.325) 105.872,55.325 U11.C1@106.073,55.527
  Bottom Layer w0.169: v2(105.5,55.325) v2@105.555,55.27 ; C111.1@106.311,54.239 C111.1@106.311,54.282
  Bottom Layer w0.305: v2@105.555,55.27 105.555,55.037 C111.1@106.311,54.282
ETH_PHY_RST: U8.E18 U14.2 | length 12.1
  Top Layer w0.152: U14.2@67.725,54.925 67.775,54.875 68.325,54.875 68.45,54.75 68.45,53.05 68.757,52.743 69.993,52.743 72.675,55.425 76.316,55.425 76.592,55.15 U8.E18@76.672,55.15
F9P_RF_IN: D3.1 J6.1 L7.1 U23.11 | length 19.2
  Top Layer w0.167: U23.11@131.476,38.626 138.372,38.626 138.425,38.679 L7.1@138.425,38.725 ; L7.1@138.575,38.682 144.857,38.682 D3.1@144.875,38.7 ; D3.1@145.025,38.625 145.082,38.682 J6.1@150.925,38.682
F9P_RTK_STAT: R109.1 U23.15 | length 38.5
  Top Layer w0.203: U23.15@120.274,37.824 119.976,37.526 U23.15@119.476,37.526 117.099,37.526 116.475,38.15 116.475,41.05 117.375,41.95 131.575,41.95 v5(132.05,41.475)
  Bottom Layer w0.152: R109.1@143.576,49.326 143.875,49.625 R109.1@143.875,49.7
  Bottom Layer w0.203: v5(132.05,41.475) 139.901,49.326 R109.1@143.576,49.326
F9P_RTK_STAT_D: LED4.1 R109.2 | length 8.6
  Top Layer w0.203: v1(149.65,53.55) 150.819,53.55 LED4.1@151.025,53.344
  Bottom Layer w0.203: R109.2@145.125,49.7 147.1,49.7 147.55,50.15 147.55,51.875 148.722,53.047 149.225,53.55 v1(149.65,53.55)
F9P_TIMEPULSE: R110.1 U23.3 | length 33.4
  Top Layer w0.152: U23.3@131.476,27.926 U23.3@131.502,27.9
  Top Layer w0.203: U23.3@131.502,27.9 v5(134.65,27.9)
  MidLayer2SIG w0.152: v5@134.625,27.825 v5@134.625,27.875
  MidLayer2SIG w0.203: v5@134.625,27.875 135.05,28.3 135.05,31.475 134.825,31.7 132.375,31.7 131.65,32.425 131.65,39.275 134.219,41.844 v5(136.607,41.844)
  Bottom Layer w0.152: 142.625,47.85 R110.1@143.875,47.85
  Bottom Layer w0.203: v5@136.6,41.825 142.625,47.85
F9P_TIMEPULSE_D: LED5.1 R110.2 | length 6.1
  Top Layer w0.152: v1(149.875,48.075) 150.813,48.075 LED5.1@151.025,47.863
  Bottom Layer w0.152: R110.2@145.125,47.85 R110.2@145.35,48.075
  Bottom Layer w0.203: R110.2@145.35,48.075 v1(149.875,48.075)
F9P_USB_N: U16.11 U23.5 | length 117.2
  Top Layer w0.146: v5(41.425,49.073) 41.364,49.073 41.162,49.275 39.424,49.275 38.527,50.172 38.527,52.439 40.212,54.124 41.302,54.124 41.415,54.238 U16.11@41.69,54.238 ; U23.5@131.476,30.126 131.976,30.126 132.303,30.453 132.389,30.539 132.891,30.539 134.06,30.539 134.216,30.384 v5(134.3,30.384)
  MidLayer2SIG w0.113: v5(41.425,49.073) 41.47,49.073 41.663,49.267 43.658,49.267 66.851,26.074 66.922,26.003 ccw(c67.171,26.253) 67.171,25.9 78.031,25.9 cw(c78.031,25.787) 78.063,25.895 ccw(c78.097,26.01) 78.066,25.895 ccw(c78.355,26.925) 78.355,25.855 96.05,25.855 115.244,25.855 116.039,26.65 127.525,26.65 127.55,26.65 131.456,30.556 134.062,30.556 134.234,30.384 v5(134.3,30.384)
F9P_USB_P: U16.12 U23.6 | length 116.7
  Top Layer w0.146: v5(41.425,49.7) 41.329,49.7 41.177,49.548 39.537,49.548 38.8,50.286 38.8,52.326 40.325,53.851 41.302,53.851 41.415,53.738 U16.12@41.69,53.738 ; U23.6@131.765,30.937 U23.6@131.476,31.226 131.976,31.226 U23.6@132.303,30.899 ; U23.6@132.303,30.898 132.389,30.813 132.778,30.813 134.06,30.813 134.216,30.968 v5(134.3,30.968)
  MidLayer2SIG w0.113: v5(41.425,49.7) 41.47,49.7 41.663,49.506 43.758,49.506 67.021,26.243 cw(c66.851,26.074) 67.022,26.242 67.091,26.173 ccw(c67.171,26.253) 67.171,26.14 78.031,26.14 cw(c78.031,25.787) 78.128,26.126 ; 78.129,26.126 ccw(c78.355,26.925) 78.355,26.095 115.145,26.095 115.94,26.89 127.451,26.89 ; 127.455,26.895 127.451,26.89 ; v5(134.3,30.968) 134.234,30.968 134.062,30.796 131.357,30.796 127.451,26.89
F9P_VCC_RF: R108.2 U23.9 | length 2.1
  Top Layer w0.305: U23.9@131.476,36.426 131.501,36.401 133.526,36.401 R108.2@133.55,36.425
F9P_VCC_RF_FIL: C149.1 L7.2 R108.1 | length 4.9
  Top Layer w0.305: R108.1@134.6,36.375 134.623,36.398 135.927,36.398 C149.1@135.95,36.375 ; C149.1@136.075,36.42 138.22,36.42 138.575,36.775 L7.2@138.575,37.65